# Altium PCB pdb-25.PcbDoc (part 3 of 4)
Units mil, origin at the board's own origin, x right, y up, seen from the top; angles counter-clockwise.
Board outline 5000 x 5500 mil, 4 copper layers (Top Layer, GND, 3V3, Bottom Layer), stack 23.756 mil thick; 410 components, 167 nets, 1014 pads, 884 vias.
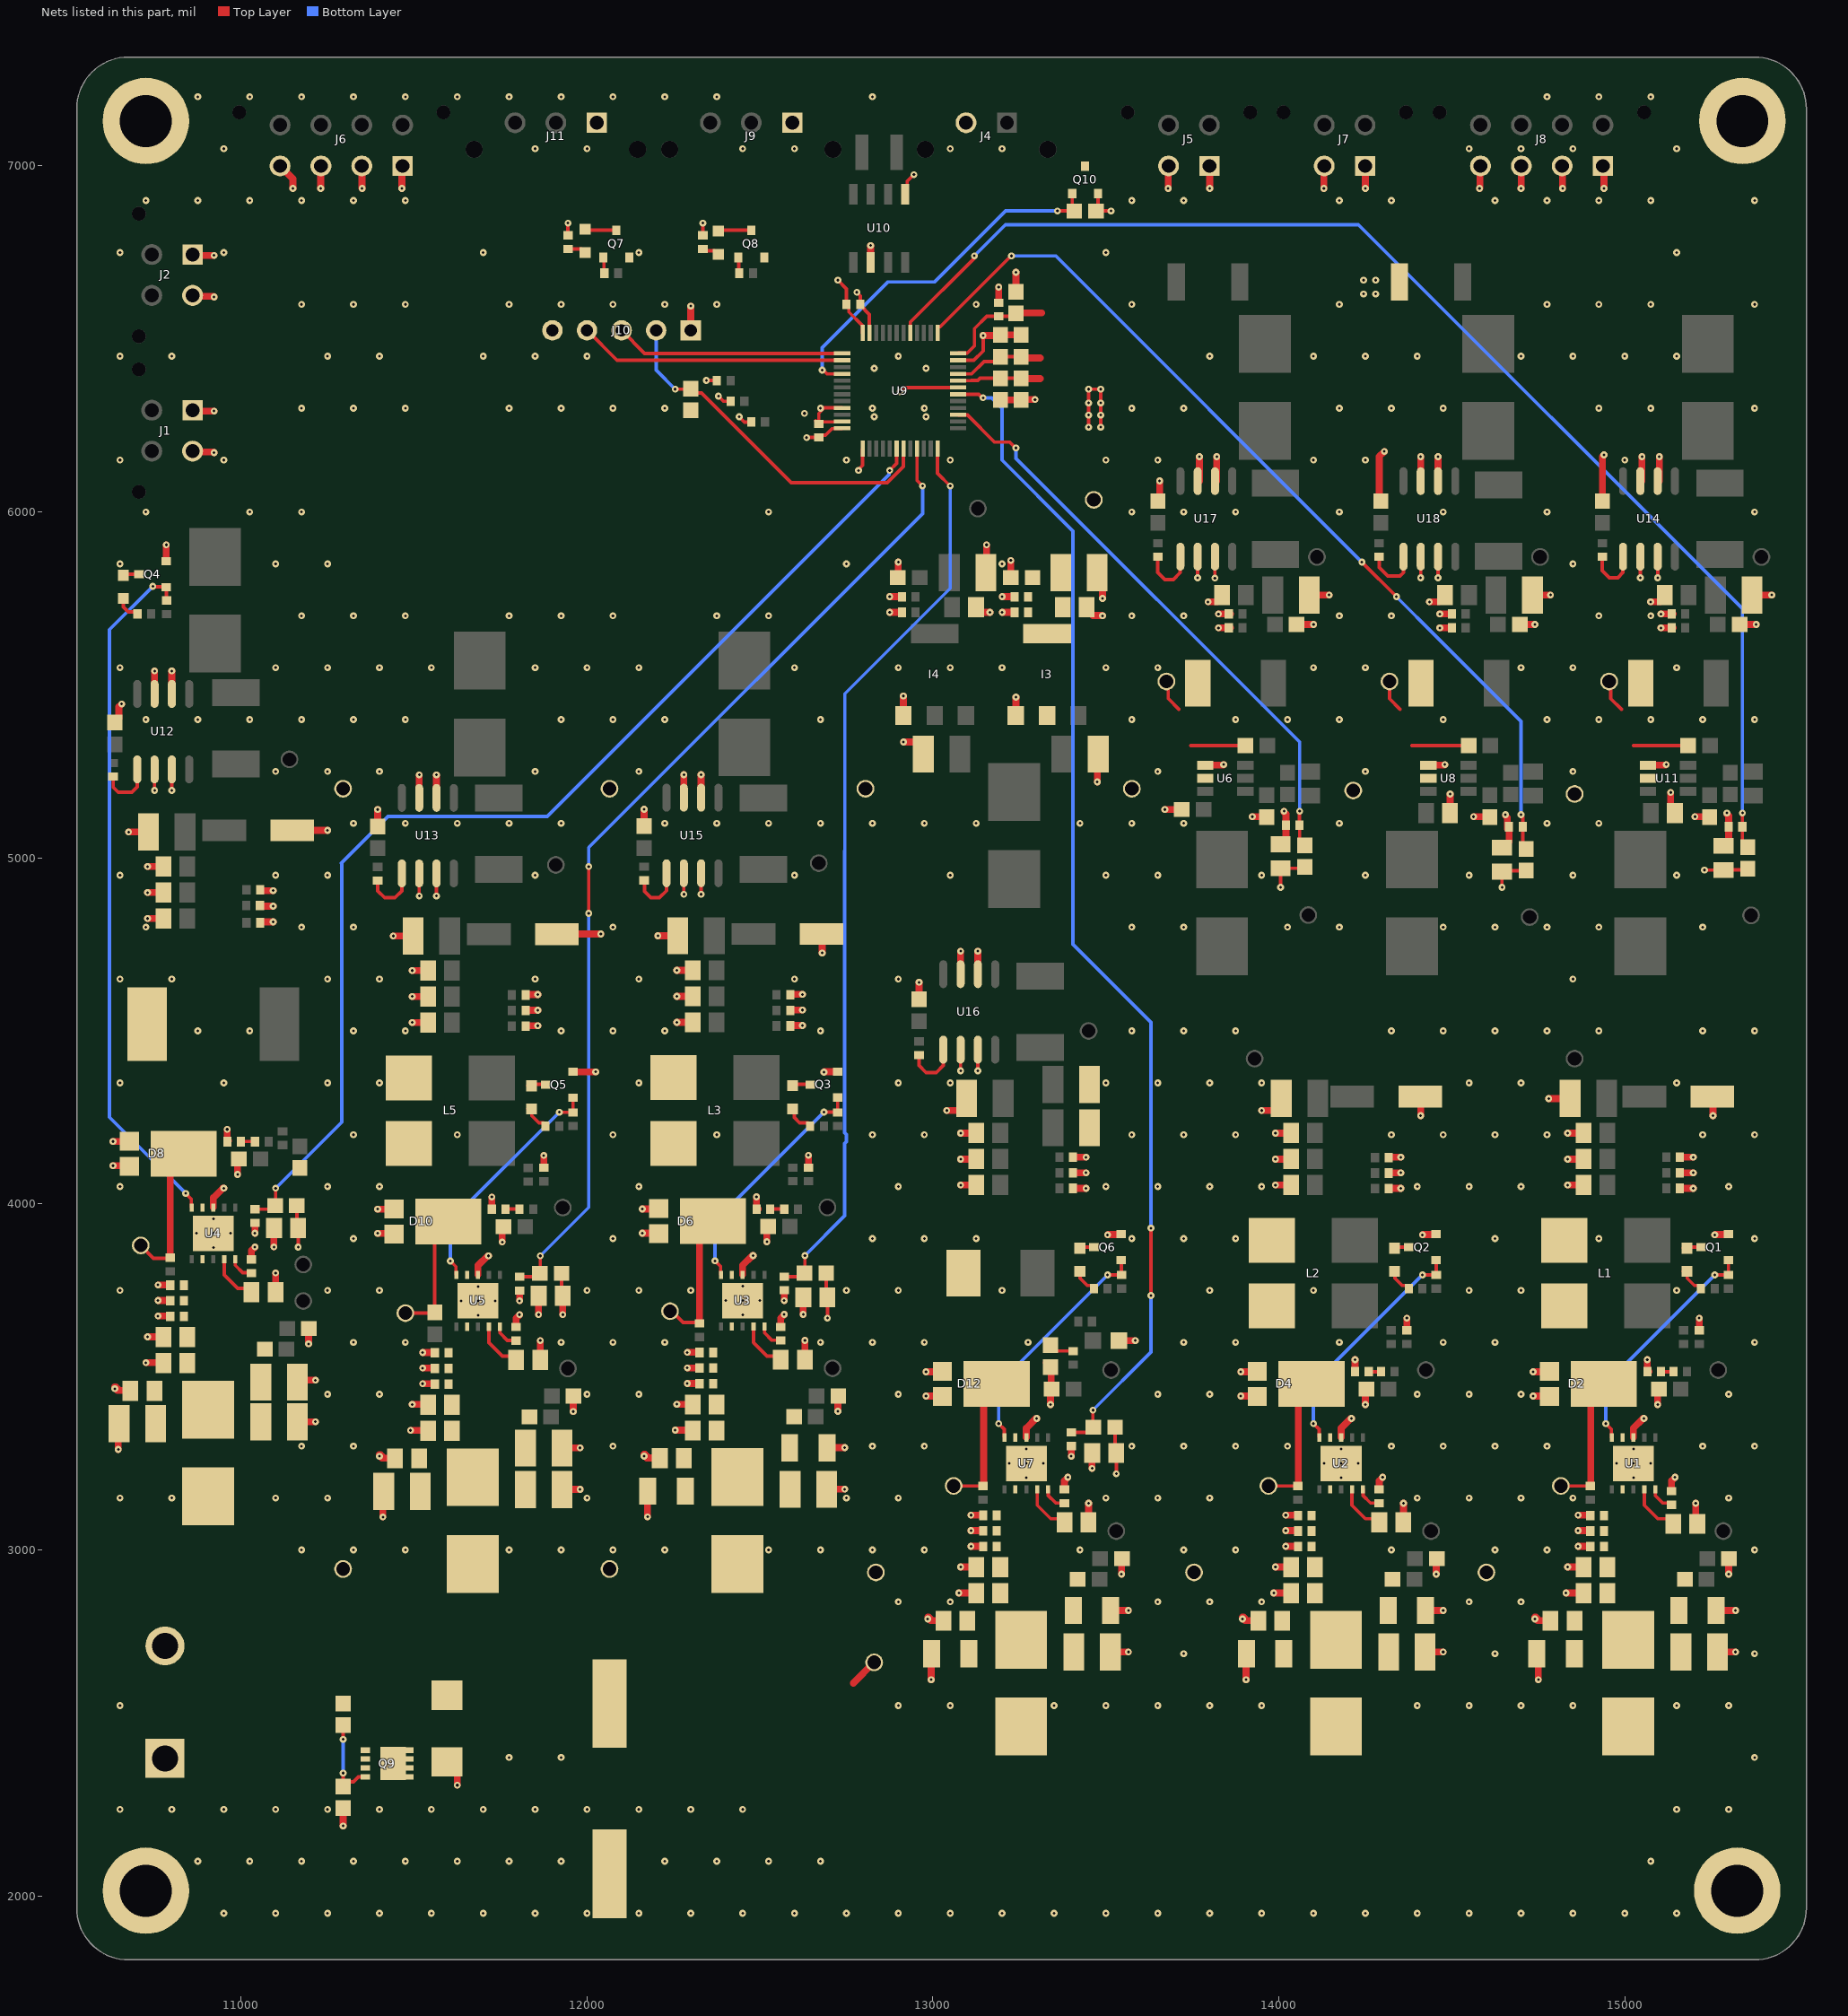
[diagram p5: the nets of this part, all layers, seen from the top]

## Via types
v1: diameter 20, hole 8, Top Layer to Bottom Layer, 854 vias
v2: diameter 17.72, hole 7.87, Top Layer to Bottom Layer, 30 vias

## Nets (pads, with @x,y where several pads share a name; then routed paths per layer and width w, separated by ;. In a path a pad name is that pad's centre, name@x,y a point inside that pad or via, vN(x,y) a via of type N, cw(c..) or ccw(c..) an arc to the next point about the centre after c; other vN are vias at no path point) (continued)
GND: C1.1 C2.1 C3.1 C4.1 C5.1 C6.1 C7.1 C8.1 C9.1 C10.1 C11.1 C12.1 C13.1 C14.1 C16.1 C17.1 C18.1 C19.1 C20.1 C21.1 C22.1 C23.1 C24.1 C25.1 C26.1 C27.1 C28.1 C29.1 C30.1 C31.1 C32.1 C33.1 C34.1 C35.1 C37.1 C38.1 C39.1 C40.1 C41.1 C42.1 C43.1 C44.1 C45.1 C46.1 C47.1 C48.1 C49.1 C50.1 C51.1 C52.1 C53.1 C54.1 C55.1 C56.1 C58.1 C59.1 C60.1 C61.1 C62.1 C63.1 C64.1 C65.1 C66.1 C67.1 C68.1 C69.1 C70.1 C71.1 C72.1 C73.1 C74.1 C75.1 C76.1 C77.1 C79.1 C80.1 C81.1 C82.1 C83.1 C84.1 C85.1 C86.1 C87.1 C88.1 C89.1 C90.1 C91.1 C92.1 C93.1 C94.1 C95.1 C96.1 C97.1 C98.1 C100.1 C101.1 C102.1 C103.1 C104.1 C105.1 C107.1 C108.1 C109.1 C110.1 C111.1 C113.2 C114.1 C115.1 C116.1 C117.1 C118.1 C120.1 C121.1 C122.1 C123.1 C124.1 C126.1 C127.1 C128.1 C129.1 C130.1 C131.1 C132.1 C133.1 C134.1 C135.1 C136.1 C137.1 C138.1 C139.1 C140.1 C141.1 C142.1 C143.1 C144.1 C145.1 C146.1 C147.2 C148.2 C149.2 C150.2 C151.2 C152.2 C153.2 C154.2 C155.2 C156.2 C157.2 C158.2 C159.2 C160.2 C161.1 C162.1 C163.1 C164.1 C165.1 C166.1 C167.1 C168.1 C170.1 C171.1 C172.1 C173.1 C174.1 C176.1 C177.1 C178.1 C179.1 C181.1 C182.1 C183.2 C184.1 C185.1 C186.2 C187.2 D2.1 D4.1 D6.1 D8.1 D10.1 D12.1 D15.2 GND.1 I3.1 I4.1 J1.1@10860,6294.06 J1.2 J2.1@10860,6744.06 J2.2 J5.1@13799.06,7000 J5.2 J6.1 J6.2 J6.3 J6.4 J7.1@14249.06,7000 J7.2 J8.1 J8.2 J8.3 J8.4 J9.P$1 J10.1 J11.P$1 pad. Q1.2 Q2.2 Q3.2 Q4.2 Q5.2 Q6.2 Q7.2 Q8.2 Q9.3 Q10.2 R4.1 R7.1 R8.1 R12.1 R15.1 R16.1 R20.1 R23.1 R24.1 R28.1 R31.1 R32.1 R36.1 R39.1 R40.1 R42.2 R46.1 R49.1 R62.1 R63.1 R64.1 R68.1 R69.1 R70.1 R72.1 R88.2 R90.1 R91.1 R93.1 R94.2 U1.8 U1.11 U2.8 U2.11 U3.8 U3.11 U4.8 U4.11 U5.8 U5.11 U6.1 U7.8 U7.11 U8.1 U9.19 U9.23 U9.35 U9.45 U9.47 U10.2 U11.1 U12.2 U12.3 U13.2 U13.3 U14.2 U14.3 U15.2 U15.3 U16.2 U16.3 U17.2 U17.3 U18.2 U18.3 | length 14119.7
  Top Layer w10: v1@12630,6285 v1@12631.91,6283.09 ; C140.1@12661.22,6263.46 12661.22,6261.5 12668.03,6254.69 C140.1@12670,6254.69 ; U9.47@12737.68,6261.42 12736.68,6260.42 12675.73,6260.42 C140.1@12670,6254.69 ; U9.45@12737.68,6300.79 12685.79,6300.79 12670,6285 C140.1@12670,6254.69 ; v1(12780,6635) 12780,6634.21 12789.68,6624.52 C141.1@12789.68,6600 12789.68,6598.03 12816.42,6571.3 U9.35@12816.42,6517.32 ; v1(12905,6347.08) 12907.71,6347.08 12920.47,6359.84 U9.19@13072.32,6359.84 ; U9.23@13072.32,6438.58 13118.58,6438.58 13145,6465 v1(13145,6510) ; C143.1@13195,6323.5 C143.1@13195,6324.49 ; Q10.2@13477.4,6920.63 13477.4,6875.91 R91.1@13471.5,6870 v1(13515,6870)
  Top Layer w20: v1(10630,4110.5) 10676.34,4110.5 D8.1@10677.56,4109.28 ; v1(10630,4180.5) 10676.34,4180.5 D8.1@10677.56,4181.72 ; v1@10635,3471 10637.71,3471 v1@10642.71,3466 ; C154.2@10635,5392 10646.65,5403.65 10646.65,5436.65 v1(10655,5445) ; v1@10642.71,3461 C65.1@10680.35,3461 ; v1(10645,3290.5) C80.1@10645,3366.87 ; v1(10675,5075) C67.1@10732.2,5075 ; v1(10725,3541) C66.1@10770.35,3541 ; v1(10730,3616) C70.1@10775.35,3616 ; v1(10730,4825) C74.1@10775.35,4825 ; v1(10730,4900) C69.1@10775.35,4900 ; v1(10730,4975) C68.1@10775.35,4975 ; U12.3@10750,5474.65 v1(10750,5540.5) ; v1(10760,3676) C71.1@10795.32,3676 ; v1(10760,3721) C72.1@10795.32,3721 ; v1(10760,3766) C73.1@10795.32,3766 ; Q4.2@10783.74,5857.4 v1(10783.74,5905) ; U12.2@10800,5474.65 v1(10800,5540.5) ; J1.2@10860,6175.94 10862.42,6173.52 10920.19,6173.52 v1(10922.11,6171.61) ; J1.1@10860,6294.06 10862.45,6291.61 v1(10922.11,6291.61) ; J2.2@10860,6625.94 10862.42,6623.52 10920.19,6623.52 v1(10922.11,6621.61) ; J2.1@10860,6744.06 10862.45,6741.61 v1(10922.11,6741.61) ; U4.8@10920,3990.8 10920,4017.61 10947.89,4045.5 v1(10950,4045.5) ; v1(10960,4215.5) 10960,4185.81 C84.1@10963.07,4182.75 ; v1(10990,4085.5) 10990,4127 C83.1@10993.5,4130.5 ; R31.1@11030,3840.68 11030,3865.02 11040,3875.02 v1(11040,3875.5) ; v1(11040,3915.5) R62.1@11040,3945.32 R62.1@11040,3945.82 ; C77.1@11057.34,4815.5 v1(11092.66,4815.5) ; C76.1@11057.34,4860.5 v1(11092.66,4860.5) ; C75.1@11057.34,4905.5 v1(11092.66,4905.5) ; v1(11095,3875.5) 11095,3930.15 C147.2@11095.35,3930.5 ; C82.1@11099.65,3746 11100,3746.35 v1(11100,3800.5) ; J6.4@11112.83,7000 11150,6962.83 v1(11150,6935) ; C64.1@11152.8,3396 11178.3,3370.5 v1(11215,3370.5) ; C81.1@11153.43,5080 v1(11250,5080) ; C79.1@11159.13,3506 11174.63,3490.5 v1(11215,3490.5) ; v1(11195,3595.5) 11195,3639 R28.1@11196.5,3640.5 ; v1(11230,6935) 11230.47,6935.47 11230.47,6999.53 J6.3@11230.94,7000 ; v1(11295,2202.21) R88.2@11295,2250.71 ; J6.2@11349.06,7000 11349.53,6999.53 11349.53,6935.47 v1(11350,6935) ; v1(11395,3915) 11441.34,3915 D10.1@11442.56,3913.78 ; v1(11395,3985) 11441.34,3985 D10.1@11442.56,3986.22 ; C155.2@11395,5091.5 v1(11395,5140) ; v1@11400,3275.5 11402.71,3275.5 v1@11407.71,3270.5 ; v1@11407.71,3265.5 C91.1@11445.35,3265.5 ; v1(11410,3095) C100.1@11410,3171.37 ; v1(11440,4774.5) C88.1@11497.2,4774.5 ; v1(11465,6935) 11465,6997.83 J6.1@11467.17,7000 ; v1(11490,3345.5) C86.1@11535.35,3345.5 ; v1(11495,3420.5) C87.1@11540.35,3420.5 ; v1(11495,4524.5) C95.1@11540.35,4524.5 ; v1(11495,4599.5) C89.1@11540.35,4599.5 ; v1(11495,4674.5) C90.1@11540.35,4674.5 ; U13.3@11515,5174.15 v1(11515,5240) ; v1(11525,3480.5) C92.1@11560.32,3480.5 ; v1(11525,3525.5) C93.1@11560.32,3525.5 ; v1(11525,3570.5) C94.1@11560.32,3570.5 ; U13.2@11565,5174.15 v1(11565,5240) ; D15.2@11595,2387.2 11625,2357.2 v1(11625,2320) ; U5.8@11685,3795.3 11685,3822.11 11712.89,3850 v1(11715,3850) ; C105.1@11725,3990.32 v1(11725,4020) ; v1(11755,3890) 11755,3931.5 C104.1@11758.5,3935 ; R39.1@11795,3645.18 11795,3669.52 11805,3679.52 v1(11805,3680) ; v1(11805,3720) R63.1@11805,3749.82 R63.1@11805,3750.32 ; C98.1@11822.34,4515 v1(11857.66,4515) ; C97.1@11822.34,4560 v1(11857.66,4560) ; C96.1@11822.34,4605 v1(11857.66,4605) ; v1(11860,3680) 11860,3734.65 C148.2@11860.35,3735 ; C103.1@11864.65,3550.5 11865,3550.85 v1(11865,3605) ; R40.1@11875,4105 v1(11875,4140) ; C85.1@11917.8,3200.5 11943.3,3175 v1(11980,3175) ; C102.1@11917.93,4780 v1(12040,4780) ; C101.1@11924.13,3310.5 11939.63,3295 v1(11980,3295) ; Q5.2@11959.37,4381.9 v1(12025,4381.9) ; v1(11960,3400) 11960,3443.5 R36.1@11961.5,3445 ; v1(12160,3915.5) 12206.34,3915.5 D6.1@12207.56,3914.28 ; v1(12160,3985.5) 12206.34,3985.5 D6.1@12207.56,3986.72 ; v1@12165,3276 12167.71,3276 v1@12172.71,3271 ; C157.2@12165,5092 v1(12165,5140.5) ; v1@12172.71,3266 C44.1@12210.35,3266 ; v1(12175,3095.5) C59.1@12175,3171.87 ; v1(12205,4775) C46.1@12262.2,4775 ; v1(12255,3346) C45.1@12300.35,3346 ; v1(12260,3421) C49.1@12305.35,3421 ; v1(12260,4525) C53.1@12305.35,4525 ; v1(12260,4600) C47.1@12305.35,4600 ; v1(12260,4675) C48.1@12305.35,4675 ; U15.3@12280,5174.65 v1(12280,5240.5) ; v1(12290,3481) C50.1@12325.32,3481 ; v1(12290,3526) C51.1@12325.32,3526 ; v1(12290,3571) C52.1@12325.32,3571 ; J10.1@12300,6525 v1(12300,6595) ; U15.2@12330,5174.65 v1(12330,5240.5) ; U3.8@12450,3795.8 12450,3822.61 12477.89,3850.5 v1(12480,3850.5) ; v1(12490,4020.5) 12490,3990.82 C63.1@12495.16,3985.66 ; v1(12520,3890.5) 12520,3932 C62.1@12523.5,3935.5 ; R23.1@12560,3645.68 12560,3670.02 12570,3680.02 v1(12570,3680.5) ; v1(12570,3720.5) R68.1@12570,3750.32 R68.1@12570,3750.82 ; C56.1@12587.34,4515.5 v1(12622.66,4515.5) ; C55.1@12587.34,4560.5 v1(12622.66,4560.5) ; C54.1@12587.34,4605.5 v1(12622.66,4605.5) ; v1(12625,3680.5) 12625,3735.15 C150.2@12625.35,3735.5 ; C61.1@12629.65,3551 12630,3551.35 v1(12630,3605.5) ; R24.1@12640,4105.5 v1(12640,4140.5) ; C60.1@12678.43,4785 12680,4783.43 v1(12680,4725.5) ; C43.1@12682.8,3201 12708.3,3175.5 v1(12745,3175.5) ; v1(12685,4381) 12686.2,4382.2 12723.17,4382.2 Q3.2@12724.37,4383.4 ; C58.1@12689.13,3311 12704.63,3295.5 v1(12745,3295.5) ; v1(12725,3400.5) 12725,3444 R20.1@12726.5,3445.5 ; U10.2@12820,6721.57 v1(12820,6770) ; v1(12875,5710) C129.1@12910.32,5710 ; v1(12875,5755) C128.1@12910.32,5755 ; C127.1@12898.5,5810 12900,5811.5 v1(12900,5855) ; I4.1@12914.45,5415.55 v1(12914.45,5468.11) ; v1(12915,5335) 12952.09,5335 12972.2,5314.88 C131.1@12972.2,5300 ; C158.2@12960,4592 v1(12960,4640.5) ; v1(12980,3445) 13026.34,3445 D12.1@13027.56,3443.78 ; v1(12980,3515) 13026.34,3515 D12.1@13027.56,3516.22 ; v1@12985,2805.5 12987.71,2805.5 v1@12992.71,2800.5 ; v1@12992.71,2795.5 C162.1@13030.35,2795.5 ; v1(12995,2625) C182.1@12995,2701.37 ; v1(13040,4270) 13072.09,4270 13097.2,4295.12 C117.1@13097.2,4304.5 ; v1(13075,2875.5) C116.1@13120.35,2875.5 ; v1(13080,2950.5) C115.1@13125.35,2950.5 ; v1(13080,4054.5) C166.1@13125.35,4054.5 ; v1(13080,4129.5) C161.1@13125.35,4129.5 ; v1(13080,4204.5) C118.1@13125.35,4204.5 ; U16.3@13080,4664.65 v1(13080,4730.5) ; v1(13110,3010.5) C163.1@13145.32,3010.5 ; v1(13110,3055.5) C164.1@13145.32,3055.5 ; v1(13110,3100.5) C165.1@13145.32,3100.5 ; C130.1@13124.65,5725 13139.65,5710 v1(13165,5710) ; U16.2@13130,4664.65 v1(13130,4730.5) ; v1(13145,6510) 13145.06,6510.06 13193.57,6510.06 C145.1@13195,6511.5 C146.1@13255,6511.5 ; C134.1@13152.8,5825 13155,5827.2 v1(13155,5905) ; C139.1@13190,6604.69 v1(13190,6650) ; C143.1@13195,6323.5 C144.1@13255,6323.5 13256.5,6325 v1(13295,6325) ; v1(13200.32,5710) C136.1@13235.63,5710 ; v1(13200.32,5755) C137.1@13235.63,5755 ; C135.1@13225,5810 v1(13225,5860) ; I3.1@13240,5412.44 v1(13240,5465) ; C142.1@13240,6647.34 v1(13240,6692.66) ; U7.8@13270,3325.3 13270,3352.11 13297.89,3380 v1(13300,3380) ; C187.2@13328.35,3541.14 13340,3529.49 C187.2@13340,3528.5 13341.75,3526.75 13341.75,3466.75 C185.1@13343.5,3465 13340,3461.5 v1(13340,3420) ; R93.1@13380,3175.18 13380,3199.52 13390,3209.52 v1(13390,3210) ; v1(13400,3270.5) R69.1@13400,3300.32 ; C179.1@13407.34,4045 v1(13442.66,4045) ; C177.1@13407.34,4090 v1(13442.66,4090) ; C167.1@13407.34,4135 v1(13442.66,4135) ; C138.1@13444.65,5725 13444.65,5718.9 13462.48,5701.06 13488.94,5701.06 v1(13490,5700) ; C184.1@13449.65,3080.5 13450,3080.85 v1(13450,3135) ; v1(13460,3235.5) C151.2@13460,3265.32 ; v1(13475,5220) 13475,5297.2 C133.1@13477.8,5300 ; C132.1@13475,5825 13490,5810 v1(13490,5750) ; C114.1@13502.8,2730.5 13528.3,2705 v1(13565,2705) ; v1(13505,3910.5) 13506.2,3911.7 13543.17,3911.7 Q6.2@13544.37,3912.9 ; C181.1@13509.13,2840.5 13524.63,2825 v1(13565,2825) ; R94.2@13537.4,3605 v1(13585,3605) ; v1(13545,2930) 13545,2973.5 R46.1@13546.5,2975 ; C159.2@13655.35,6031.5 v1(13655.35,6090) ; v1(13670.71,5140) 13713.86,5140 C111.1@13717.45,5136.41 ; v1(13680,6935) 13680.47,6935.47 13680.47,6999.53 J5.2@13680.94,7000 ; U17.3@13770.35,6089.15 v1(13770.35,6160) ; U6.1@13792.28,5267.4 13793.58,5268.7 13839.06,5268.7 v1(13840.35,5270) ; v1(13795.35,5740) 13822.87,5740 13840.71,5757.83 C110.1@13840.71,5760 ; J5.1@13799.06,7000 13800,6999.06 v1(13800,6935) ; U17.2@13820.35,6089.15 v1(13820.35,6160) ; v1(13825.35,5665) C109.1@13855.32,5665 C109.1@13860.67,5665 ; v1(13825.35,5705) C108.1@13855.32,5705 C108.1@13860.67,5705 ; v1(13890,3445) 13936.34,3445 D4.1@13937.56,3443.78 ; v1(13890,3515) 13936.34,3515 D4.1@13937.56,3516.22 ; v1@13895,2805.5 13897.71,2805.5 v1@13902.71,2800.5 ; v1@13902.71,2795.5 C23.1@13940.35,2795.5 ; v1(13905,2625) C38.1@13905,2701.37 ; v1(13923.26,5119.36) 13969.49,5119.36 R42.2@13970.35,5118.5 ; v1(13950,4270) 13982.09,4270 14007.2,4295.12 C25.1@14007.2,4304.5 ; v1(13985,2875.5) C24.1@14030.35,2875.5 ; v1(13990,2950.5) C28.1@14035.35,2950.5 ; v1(13990,4054.5) C32.1@14035.35,4054.5 ; v1(13990,4129.5) C27.1@14035.35,4129.5 ; v1(13990,4204.5) C26.1@14035.35,4204.5 ; C152.2@14005,5039.65 14020.32,5054.96 R70.1@14020.32,5095 14020.32,5126.98 14015,5132.29 v1(14015,5135) ; v1(14020,3010.5) C29.1@14055.32,3010.5 ; v1(14020,3055.5) C30.1@14055.32,3055.5 ; v1(14020,3100.5) C31.1@14055.32,3100.5 ; C107.1@14056.85,5675 v1(14100.35,5675) ; C113.2@14093.15,5760 v1(14145.35,5760) ; v1(14130,6935) 14130.47,6935.47 14130.47,6999.53 J7.2@14130.94,7000 ; U2.8@14180,3325.3 14180,3352.11 14207.89,3380 v1(14210,3380) ; C42.1@14220,3520.32 v1(14220,3550) ; J7.1@14249.06,7000 14250,6999.06 v1(14250,6935) ; v1(14250,3420) 14250,3461.5 C41.1@14253.5,3465 ; R15.1@14290,3175.18 14290,3199.52 14300,3209.52 v1(14300,3210) ; C160.2@14290,6031.5 14290,6160 v1(14305,6175) ; C35.1@14317.34,4045 v1(14352.66,4045) ; C34.1@14317.34,4090 v1(14352.66,4090) ; C33.1@14317.34,4135 v1(14352.66,4135) ; C40.1@14359.65,3080.5 14360,3080.85 v1(14360,3135) ; R16.1@14370,3635 v1(14370,3670) ; v1(14410,4255) C39.1@14410,4312.93 ; U18.3@14410,6089.15 v1(14410,6160) ; C22.1@14412.8,2730.5 14438.3,2705 v1(14475,2705) ; C39.1@14413.43,4314.5 C39.1@14415,4312.93 ; v1(14415,3910.5) 14416.2,3911.7 14453.17,3911.7 Q2.2@14454.37,3912.9 ; C37.1@14419.13,2840.5 14434.63,2825 v1(14475,2825) ; U8.1@14431.93,5267.4 14433.23,5268.7 14478.7,5268.7 v1(14480,5270) ; v1(14435,5740) 14462.52,5740 14480.35,5757.83 C123.1@14480.35,5760 ; v1(14455,2930) 14455,2973.5 R12.1@14456.5,2975 ; U18.2@14460,6089.15 v1(14460,6160) ; v1(14465,5665) C122.1@14500.32,5665 ; v1(14465,5705) C121.1@14500.32,5705 ; C124.1@14494.65,5130 14495,5130.35 v1(14495,5185) ; v1(14562.91,5119.36) 14609.14,5119.36 R49.1@14610,5118.5 ; v1(14580,6935) 14581.42,6936.41 14581.42,6998.59 J8.4@14582.83,7000 ; C153.2@14645,5029.65 14647.48,5029.65 14665.32,5047.48 R72.1@14665.32,5090 ; v1@14655,5122.29 14660.32,5116.98 R72.1@14660.32,5085 ; C120.1@14696.5,5675 v1(14740,5675) ; v1(14700,6935) 14700.47,6935.47 14700.47,6999.53 J8.3@14700.94,7000 ; C126.1@14732.8,5760 v1(14785,5760) ; v1(14735,3445) 14781.34,3445 D2.1@14782.56,3443.78 ; v1(14735,3515) 14781.34,3515 D2.1@14782.56,3516.22 ; v1@14740,2805.5 14742.71,2805.5 v1@14747.71,2800.5 ; v1@14747.71,2795.5 C2.1@14785.35,2795.5 ; v1(14750,2625) C17.1@14750,2701.37 ; v1(14780,4304.5) C4.1@14837.2,4304.5 ; J8.2@14819.06,7000 14819.53,6999.53 14819.53,6935.47 v1(14820,6935) ; v1(14830,2875.5) C3.1@14875.35,2875.5 ; v1(14835,2950.5) C7.1@14880.35,2950.5 ; v1(14835,4054.5) C11.1@14880.35,4054.5 ; v1(14835,4129.5) C6.1@14880.35,4129.5 ; v1(14835,4204.5) C5.1@14880.35,4204.5 ; v1(14865,3010.5) C8.1@14900.32,3010.5 ; v1(14865,3055.5) C9.1@14900.32,3055.5 ; v1(14865,3100.5) C10.1@14900.32,3100.5 ; C156.2@14935,6031.5 14935,6160 v1(14940,6165) ; J8.1@14937.17,7000 14940,6997.17 v1(14940,6935) ; U1.8@15025,3325.3 15025,3352.11 15052.89,3380 v1(15055,3380) ; U14.3@15049.65,6089.15 v1(15049.65,6160) ; v1(15065,3550) 15065,3520.32 C21.1@15070.16,3515.16 ; U11.1@15071.57,5267.4 15072.87,5268.7 15118.35,5268.7 v1(15119.65,5270) ; v1(15074.65,5740) 15102.17,5740 15120,5757.83 C173.1@15120,5760 ; v1(15095,3420) 15095,3461.5 C20.1@15098.5,3465 ; U14.2@15099.65,6089.15 v1(15099.65,6160) ; v1(15104.65,5665) C172.1@15135.32,5665 C172.1@15139.96,5665 ; v1(15104.65,5705) C171.1@15135.32,5705 C171.1@15139.96,5705 ; v1(15132.55,5189.36) 15132.55,5143.59 C174.1@15136.14,5140 ; R7.1@15135,3175.18 15135,3199.52 15145,3209.52 v1(15145,3210) ; C14.1@15162.34,4045 v1(15197.66,4045) ; C13.1@15162.34,4090 v1(15197.66,4090) ; C12.1@15162.34,4135 v1(15197.66,4135) ; v1(15202.55,5119.36) 15248.79,5119.36 R90.1@15249.65,5118.5 ; C19.1@15204.65,3080.5 15205,3080.85 v1(15205,3135) ; R8.1@15215,3635 v1(15215,3670) ; C18.1@15253.43,4314.5 15255,4312.93 v1(15255,4255) ; C1.1@15257.8,2730.5 15283.3,2705 v1(15320,2705) ; v1(15260,3910.5) 15261.2,3911.7 15298.17,3911.7 Q1.2@15299.37,3912.9 ; C16.1@15264.13,2840.5 15279.63,2825 v1(15320,2825) ; C149.2@15285,5034.65 15300.32,5049.96 R64.1@15300.32,5090 15300.32,5121.98 v1@15295,5127.29 ; v1(15300,2930) 15300,2973.5 R4.1@15301.5,2975 ; C170.1@15336.14,5675 v1(15379.65,5675) ; C176.1@15372.44,5760 v1(15424.65,5760)
  other v1: 10950,1950 11100,1950 11250,1950 11400,1950 11550,1950 11700,1950 11850,1950 12000,1950 12150,1950 12300,1950 12450,1950 12600,1950 12750,1950 12900,1950 13050,1950 13200,1950 13350,1950 13500,1950 13650,1950 13800,1950 13950,1950 14100,1950 14250,1950 14400,1950 14550,1950 14700,1950 14850,1950 15000,1950 15150,1950 10875,2100 11025,2100 11175,2100 11325,2100 11475,2100 11625,2100 11775,2100 11925,2100 12225,2100 12375,2100 12525,2100 12675,2100 15075,2100 10650,2250 10800,2250 10950,2250 11100,2250 11250,2250 11400,2250 11550,2250 11700,2250 11850,2250 12000,2250 12150,2250 12300,2250 12450,2250 15150,2250 15300,2250 11775,2400 11925,2400 15375,2400 10650,2550 12900,2550 13050,2550 13350,2550 13500,2550 13650,2550 13800,2550 13950,2550 14400,2550 14550,2550 14700,2550 14850,2550 15150,2550 15300,2550 13725,2700 14625,2700 15375,2700 12985,2800.5 13895,2800.5 14740,2800.5 12900,2850 13050,2850 13650,2850 13800,2850 13950,2850 14550,2850 14700,2850 11175,3000 11325,3000 11475,3000 11775,3000 11925,3000 12075,3000 12225,3000 12525,3000 12675,3000 12825,3000 12975,3000 13425,3000 13725,3000 13875,3000 14325,3000 14625,3000 14775,3000 15375,3000 10650,3150 10800,3150 11100,3150 11250,3150 12000,3150 12750,3150 12900,3150 13500,3150 13650,3150 13800,3150 14400,3150 14550,3150 14700,3150 14850,3150 15300,3150 11400,3270.5 12165,3271 11175,3300 11325,3300 12075,3300 12825,3300 12975,3300 13575,3300 13725,3300 13875,3300 14025,3300 14325,3300 14475,3300 14625,3300 14775,3300 15225,3300 15375,3300 11250,3450 11400,3450 12000,3450 12150,3450 12900,3450 13650,3450 13800,3450 14400,3450 14550,3450 14700,3450 15300,3450 10635,3466 11325,3600 11475,3600 11925,3600 12075,3600 12225,3600 12675,3600 12825,3600 12975,3600 13275,3600 13725,3600 13875,3600 14175,3600 14475,3600 14625,3600 15375,3600 10650,3750 11250,3750 11400,3750 12000,3750 12150,3750 12300,3750 12750,3750 12900,3750 13200,3750 13800,3750 14100,3750 14550,3750 14700,3750 15150,3750 11325,3900 12075,3900 12825,3900 12975,3900 13125,3900 13575,3900 13725,3900 13875,3900 14625,3900 14925,3900 15375,3900 10650,4050 11250,4050 11400,4050 12150,4050 12900,4050 13500,4050 13650,4050 13800,4050 13950,4050 14400,4050 14550,4050 14700,4050 15300,4050 11325,4200 11625,4200 12075,4200 12375,4200 12825,4200 12975,4200 13575,4200 13725,4200 13875,4200 14325,4200 14475,4200 14625,4200 14775,4200 15225,4200 15375,4200 10650,4350 10950,4350 11250,4350 11400,4350 12150,4350 12900,4350 13050,4350 13500,4350 13650,4350 13800,4350 13950,4350 14550,4350 14700,4350 15150,4350 10875,4500 11025,4500 11325,4500 11475,4500 11925,4500 12075,4500 12225,4500 12675,4500 13575,4500 13725,4500 13875,4500 14325,4500 14475,4500 14625,4500 14775,4500 14925,4500 15225,4500 15375,4500 10650,4650 10800,4650 11250,4650 11400,4650 11850,4650 12150,4650 12600,4650 12900,4650 14850,4650 10725,4800 11175,4800 11325,4800 12075,4800 13575,4800 13725,4800 14025,4800 14175,4800 14475,4800 14625,4800 14775,4800 14925,4800 15225,4800 10650,4950 11100,4950 11250,4950 11850,4950 12600,4950 13050,4950 13500,4950 13650,4950 13950,4950 14250,4950 14550,4950 14850,4950 15150,4950 11325,5100 11475,5100 11625,5100 11775,5100 11925,5100 12225,5100 12375,5100 12525,5100 12675,5100 12825,5100 12975,5100 13125,5100 13425,5100 13575,5100 13725,5100 14175,5100 14775,5100 14925,5100 14655,5125 15295,5130 11100,5250 11250,5250 11400,5250 11850,5250 12150,5250 13650,5250 14250,5250 14850,5250 10725,5400 10875,5400 11025,5400 11175,5400 11325,5400 11475,5400 11925,5400 12075,5400 12225,5400 12675,5400 13575,5400 13875,5400 14025,5400 14175,5400 14475,5400 14775,5400 14925,5400 15075,5400 15225,5400 15375,5400 10650,5550 11100,5550 11250,5550 11400,5550 11550,5550 11850,5550 12000,5550 12150,5550 12600,5550 12900,5550 13050,5550 13200,5550 13500,5550 13650,5550 14100,5550 14250,5550 14700,5550 14850,5550 15150,5550 11175,5700 11325,5700 11475,5700 11775,5700 11925,5700 12075,5700 12375,5700 12525,5700 13575,5700 13725,5700 14175,5700 14325,5700 14925,5700 15075,5700 10650,5850 11100,5850 11250,5850 12750,5850 13200,5850 14850,5850 10725,6000 11025,6000 11175,6000 12525,6000 13575,6000 13725,6000 13875,6000 14175,6000 14475,6000 14775,6000 15375,6000 10650,6150 10950,6150 12750,6150 13050,6150 13500,6150 13650,6150 14100,6150 14250,6150 15000,6150 12830,6275 12980,6275 12628.65,6285 11175,6300 11325,6300 11475,6300 11775,6300 11925,6300 12075,6300 12225,6300 12675,6300 12825,6300 12975,6300 13575,6300 13725,6300 14175,6300 14325,6300 14475,6300 14925,6300 15075,6300 15375,6300 12830,6415 12980,6415 10650,6450 10800,6450 11250,6450 11400,6450 11700,6450 11850,6450 12000,6450 12900,6450 13800,6450 14100,6450 14250,6450 14400,6450 14700,6450 14850,6450 15000,6450 15150,6450 11175,6600 11325,6600 11475,6600 11775,6600 11925,6600 12075,6600 12225,6600 12375,6600 13125,6600 13575,6600 14175,6600 14775,6600 14925,6600 15075,6600 15375,6600 10650,6750 10950,6750 11700,6750 12150,6750 13500,6750 15150,6750 10725,6900 10875,6900 11025,6900 11175,6900 11325,6900 11475,6900 13575,6900 13725,6900 14175,6900 14325,6900 14625,6900 14775,6900 14925,6900 15075,6900 15375,6900 10950,7050 11850,7050 12000,7050 12450,7050 12600,7050 13050,7050 13200,7050 14550,7050 14700,7050 14850,7050 15150,7050 10875,7200 11025,7200 11175,7200 11325,7200 11475,7200 11625,7200 11775,7200 11925,7200 12075,7200 12225,7200 12375,7200 12825,7200 14775,7200 14925,7200 15075,7200
  other v2: 13270,3208.66 14180,3208.66 15025,3208.66 13220.79,3250 13270,3250 13319.21,3250 14130.79,3250 14180,3250 14229.21,3250 14975.79,3250 15025,3250 15074.21,3250 13270,3291.34 14180,3291.34 15025,3291.34 11685,3678.66 12450,3679.16 11635.79,3720 11685,3720 11734.21,3720 12400.79,3720.5 12450,3720.5 12499.21,3720.5 11685,3761.34 12450,3761.84 10920,3873.66 10870.79,3915 10920,3915 10969.21,3915 10920,3956.34
NetC21_2: C21.2 R6.1 | length 40.6
  Top Layer w10: C21.2@15104.37,3515 R6.1@15145,3515
NetC42_2: C42.2 R14.1 | length 40.6
  Top Layer w10: C42.2@14259.37,3515 R14.1@14300,3515
NetC63_2: C63.2 R22.1 | length 40.6
  Top Layer w10: C63.2@12529.37,3985.5 R22.1@12570,3985.5
NetC84_2: C84.2 R30.1 | length 40.6
  Top Layer w10: C84.2@10999.37,4180.5 R30.1@11040,4180.5
NetC99_2: 
NetC105_2: C105.2 R38.1 | length 40.6
  Top Layer w10: C105.2@11764.37,3985 R38.1@11805,3985
NetC156_1: 
NetC157_1: 
NetC158_1: 
NetC187_1: C187.1 R92.1 | length 72
  Top Layer w10: C187.1@13340,3591.5 13356.5,3575 13404.68,3575 R92.1@13405,3574.68
NetD1_1: D1.1 R1.1 | length 78
  Top Layer w10: D1.1@15169.58,3805.3 15180.32,3794.56 15180.32,3785.18 15201.22,3764.28 15213.5,3764.28 15220.32,3757.47 R1.1@15220.32,3755.5
NetD1_2: D1.2 Q1.3 | length 52.4
  Top Layer w10: D1.2@15169.58,3872.3 15172.77,3875.5 Q1.3@15220.63,3875.5
NetD3_1: D3.1 R9.1 | length 78
  Top Layer w10: D3.1@14324.58,3805.3 14335.32,3794.56 14335.32,3785.18 14356.22,3764.28 14368.5,3764.28 14375.32,3757.47 R9.1@14375.32,3755.5
NetD3_2: D3.2 Q2.3 | length 52.4
  Top Layer w10: D3.2@14324.58,3872.3 14327.77,3875.5 Q2.3@14375.63,3875.5
NetD5_1: D5.1 R17.1 | length 84
  Top Layer w10: D5.1@12594.58,4274.81 12599.24,4270.14 12599.24,4249.91 12614.37,4234.78 12638.5,4234.78 12645.32,4227.97 R17.1@12645.32,4226
NetD5_2: D5.2 Q3.3 | length 52.4
  Top Layer w10: D5.2@12584.58,4342.81 D5.2@12587.77,4346 ; D5.2@12597.77,4346 Q3.3@12645.63,4346
NetD7_1: D7.1 R25.1 | length 73.9
  Top Layer w10: D7.1@10659.58,5749.81 10660,5749.38 10660,5725 10673.82,5711.18 10694.45,5711.18 R25.1@10700.63,5705
NetD7_2: D7.2 Q4.3 | length 46.7
  Top Layer w10: D7.2@10659.58,5816.81 10662.77,5820 Q4.3@10705,5820
NetD9_1: D9.1 R33.1 | length 78
  Top Layer w10: D9.1@11829.58,4275.31 11840.32,4264.56 11840.32,4255.18 11861.22,4234.28 11873.5,4234.28 11880.32,4227.47 R33.1@11880.32,4225.5
NetD9_2: D9.2 Q5.3 | length 52.4
  Top Layer w10: D9.2@11829.58,4342.31 11832.77,4345.5 Q5.3@11880.63,4345.5
NetD11_1: D11.1 R43.1 | length 78
  Top Layer w10: D11.1@13414.58,3805.3 13425.32,3794.56 13425.32,3785.18 13446.22,3764.28 13458.5,3764.28 13465.32,3757.47 R43.1@13465.32,3755.5
NetD11_2: D11.2 Q6.3 | length 52.4
  Top Layer w10: D11.2@13414.58,3872.3 13417.77,3875.5 Q6.3@13465.63,3875.5
NetD13_1: D13.1 R57.1 | length 53.9
  Top Layer w10: R57.1@11945,6760.31 11984.07,6760.31 D13.1@11994.58,6749.81
NetD13_2: D13.2 Q7.3 | length 91.4
  Top Layer w10: D13.2@11994.58,6816.81 11997.01,6814.37 Q7.3@12085,6814.37
NetD14_1: D14.1 R58.1 | length 51
  Top Layer w10: R58.1@12335,6760.31 12340.32,6755 12369.38,6755 D14.1@12379.58,6744.81
NetD14_2: D14.2 Q8.3 | length 96.5
  Top Layer w10: D14.2@12379.58,6811.81 12382.14,6814.37 Q8.3@12475,6814.37
NetJ3_1: J3.1 Q9.2
NetQ7_1: Q7.1 R53.1 | length 46.8
  Top Layer w10: Q7.1@12047.6,6735.63 12048.96,6734.27 12048.96,6691.36 R53.1@12050.32,6690
NetQ8_1: Q8.1 R54.1 | length 46.8
  Top Layer w10: Q8.1@12437.6,6735.63 12438.96,6734.27 12438.96,6691.36 R54.1@12440.32,6690
NetQ9_1: Q9.1 R87.2 R88.1 | length 248
  Top Layer w10: v1(11295,2355) R88.1@11295,2316.5 11308.5,2330 11325,2330 11339.29,2344.29 Q9.1@11359.53,2344.29 ; v1@11295,2455 R87.2@11295,2488.5
  Bottom Layer w10: v1(11295,2355) v1@11295,2455
  other v1: 11295,2452.5
NetR59_2: 
NetR60_2: 
NetR61_2: 
NetR65_2: 
NetR66_2: 
NetR67_2: 
NetR71_2: 
NetR76_1: R76.1 U12.5 | length 163.8
  Top Layer w10: R76.1@10630,5235.31 10630.64,5234.68 10630.64,5204.36 10645,5190 10684.5,5190 10700,5205.5 U12.5@10700,5255.85 U12.5@10700,5256.35
NetR77_1: R77.1 U13.5 | length 167.2
  Top Layer w10: R77.1@11395,4934.81 11395,4905 11415,4885 11445,4885 11465,4905 U13.5@11465,4955.35 U13.5@11465,4955.85
NetR78_1: R78.1 U14.5 | length 162.4
  Top Layer w10: R78.1@14935,5870.31 14935,5830 14955,5810 14979.65,5810 14994.62,5824.97 14994.62,5865.82 U14.5@14999.65,5870.85
NetR82_1: R82.1 U15.5 | length 162.9
  Top Layer w10: R82.1@12165,4935.31 12166.14,4934.18 12166.14,4903.86 12185,4885 12209.5,4885 12230,4905.5 U15.5@12230,4956.35
NetR83_1: R83.1 U16.5 | length 162.7
  Top Layer w10: R83.1@12960,4430.31 12960,4400 12980,4380 13010,4380 13030,4400 U16.5@13030,4445.85
NetR84_1: R84.1 U17.5 | length 177.3
  Top Layer w10: R84.1@13650,5872.44 13650,5825 13670,5805 13695.35,5805 13715,5824.65 13715,5865.5 U17.5@13720.35,5870.85
NetR86_1: R86.1 U18.5 | length 161.7
  Top Layer w10: R86.1@14290,5871.34 14290,5840 14315,5815 14350,5815 14359.79,5824.79 14359.79,5870.64 U18.5@14360,5870.85
NRST: C178.2 J10.2 U9.7 | length 1038.3
  Top Layer w10: v1(12255,6355) 12297.52,6355 C178.2@12301.26,6358.74 ; C178.2@12300,6356.5 12312.29,6344.2 12330.8,6344.2 12590,6085 12868.28,6085 12914.84,6131.56 U9.7@12914.84,6182.68
  Bottom Layer w10: J10.2@12200,6525 12200,6410 v1(12255,6355)
PGOOD_0: Q1.1 R3.1 U1.10 | length 690.5
  Top Layer w10: v1(14945,3365) 14961.1,3348.9 14961.1,3326.21 U1.10@14962.01,3325.3 ; v1(15260,3795) 15260.16,3794.84 15299.84,3794.84 R3.1@15300,3794.68 ; Q1.1@15299.37,3838.1 15299.69,3837.78 15299.69,3795.5 R3.1@15300,3795.18
  Bottom Layer w10: v1(14945,3365) 14945,3480 v1(15260,3795)
PGOOD_1: Q2.1 R11.1 U2.10 | length 690.5
  Top Layer w10: v1(14100,3365) 14116.1,3348.9 14116.1,3326.21 U2.10@14117.01,3325.3 ; v1(14415,3795) 14415.16,3794.84 14454.84,3794.84 R11.1@14455,3794.68 ; Q2.1@14454.37,3838.1 14454.69,3837.78 14454.69,3795.5 R11.1@14455,3795.18
  Bottom Layer w10: v1(14100,3365) 14100,3480 v1(14415,3795)
PGOOD_2: Q3.1 R19.1 U3.10 | length 690.5
  Top Layer w10: v1(12370,3835.5) 12386.1,3819.4 12386.1,3796.71 U3.10@12387.01,3795.8 ; v1(12685,4265.5) 12685.16,4265.34 12724.84,4265.34 R19.1@12725,4265.19 ; Q3.1@12724.37,4308.6 12724.69,4308.28 12724.69,4266 R19.1@12725,4265.69
  Bottom Layer w10: v1(12370,3835.5) 12370,3950.5 v1(12685,4265.5)
PGOOD_3: Q4.1 R27.1 U4.10 | length 2022.6
  Top Layer w10: v1(10745,5785) 10746.2,5783.8 10782.54,5783.8 Q4.1@10783.74,5782.6 10784.37,5781.97 10784.37,5745 R27.1@10785,5744.37 ; v1(10840,4030.5) 10856.1,4014.4 10856.1,3991.71 U4.10@10857.01,3990.8
  Bottom Layer w10: v1(10745,5785) 10620,5660 10620,4250.5 v1(10840,4030.5)
PGOOD_4: Q5.1 R35.1 U5.10 | length 690.5
  Top Layer w10: v1(11605,3835) 11621.1,3818.9 11621.1,3796.21 U5.10@11622.01,3795.3 ; v1(11920,4265) 11920.16,4264.84 11959.84,4264.84 R35.1@11960,4264.69 ; Q5.1@11959.37,4308.1 11959.69,4307.78 11959.69,4265.5 R35.1@11960,4265.19
  Bottom Layer w10: v1(11605,3835) 11605,3950 v1(11920,4265)
PGOOD_6: Q6.1 R45.1 U7.10 | length 690.5
  Top Layer w10: v1(13190,3365) 13206.1,3348.9 13206.1,3326.21 U7.10@13207.01,3325.3 ; v1(13505,3795) 13505.16,3794.84 13544.84,3794.84 R45.1@13545,3794.68 ; Q6.1@13544.37,3838.1 13544.69,3837.78 13544.69,3795.5 R45.1@13545,3795.18
  Bottom Layer w10: v1(13190,3365) 13190,3480 v1(13505,3795)
RA_LASER_GND: J4.2 Q10.3 | length 0.9
  Top Layer w10: Q10.3@13439.37,7000 Q10.3@13440,6999.37
RA_LASER_MCU: Q10.1 R91.2 U9.40 | length 1067.3
  Top Layer w10: v1(12680,6410) 12682.71,6410 12693.49,6399.21 U9.40@12737.68,6399.21 ; v1(13360,6870) R91.2@13403.5,6870 ; Q10.1@13402.6,6915.63 13402.6,6870.91 R91.2@13403.5,6870 ; R91.2@13408.5,6865 R91.2@13403.5,6870
  Bottom Layer w10: v1(12680,6410) 12680,6475 12870,6665 13005.35,6665 13210.35,6870 v1(13360,6870)
RT-CLK: R7.2 U1.5 | length 74.4
  Top Layer w10: U1.5@15087.99,3175.7 15088.36,3175.33 15088.36,3157.14 15110,3135.5 15134.68,3135.5 R7.2@15135,3135.82
RT-CLK_1: R15.2 U2.5 | length 74.4
  Top Layer w10: U2.5@14242.99,3175.7 14243.36,3175.33 14243.36,3157.14 14265,3135.5 14289.68,3135.5 R15.2@14290,3135.82
RT-CLK_2: R23.2 U3.5 | length 74.4
  Top Layer w10: U3.5@12512.99,3646.2 12513.36,3645.83 12513.36,3627.64 12535,3606 12559.68,3606 R23.2@12560,3606.32
RT-CLK_3: R31.2 U4.5 | length 74.4
  Top Layer w10: U4.5@10982.99,3841.2 10983.36,3840.83 10983.36,3822.64 11005,3801 11029.68,3801 R31.2@11030,3801.32
RT-CLK_4: R39.2 U5.5 | length 74.4
  Top Layer w10: U5.5@11747.99,3645.7 11748.36,3645.33 11748.36,3627.14 11770,3605.5 11794.68,3605.5 R39.2@11795,3605.82
RT-CLK_6: R93.2 U7.5 | length 74.4
  Top Layer w10: U7.5@13332.99,3175.7 13333.36,3175.33 13333.36,3157.14 13355,3135.5 13379.68,3135.5 R93.2@13380,3135.82
SS-TR: C19.2 U1.4 | length 145.6
  Top Layer w10: U1.4@15056.5,3175.7 15056.5,3129 15095.5,3090 15125.85,3090 C19.2@15135.35,3080.5
SS-TR_1: C40.2 U2.4 | length 145.6
  Top Layer w10: U2.4@14211.5,3175.7 14211.5,3129 14250.5,3090 14280.85,3090 C40.2@14290.35,3080.5
SS-TR_2: C61.2 U3.4 | length 145.6
  Top Layer w10: U3.4@12481.5,3646.2 12481.5,3599.5 12520.5,3560.5 12550.85,3560.5 C61.2@12560.35,3551
SS-TR_3: C82.2 U4.4 | length 145.6
  Top Layer w10: U4.4@10951.5,3841.2 10951.5,3794.5 10990.5,3755.5 11020.85,3755.5 C82.2@11030.35,3746
SS-TR_4: C103.2 U5.4 | length 145.6
  Top Layer w10: U5.4@11716.5,3645.7 11716.5,3599 11755.5,3560 11785.85,3560 C103.2@11795.35,3550.5
SS-TR_6: C184.2 U7.4 | length 145.6
  Top Layer w10: U7.4@13301.5,3175.7 13301.5,3129 13340.5,3090 13370.85,3090 C184.2@13380.35,3080.5
SW_0: C15.2 D2.2 L1.1 SW.1@14815,3185 U1.9 | length 425.3
  Top Layer w10: L1.1@14786.34,3655.5 L1.1@14787.56,3656.72 ; SW.1@14815,3185 14815,3203.86 14827.95,3190.91 14827.95,3190.54 14833.8,3184.68 C15.2@14900,3184.68 C15.2@14901.5,3186.18
  Top Layer w20: C15.2@14901.5,3186.18 14901.5,3442.17 D2.2@14939.33,3480
SW_1: C36.2 D4.2 L2.1 SW.1@13970,3185 U2.9 | length 425.3
  Top Layer w10: L2.1@13941.34,3655.5 L2.1@13942.56,3656.72 ; SW.1@13970,3185 13970,3203.86 13982.95,3190.91 13982.95,3190.54 13988.8,3184.68 C36.2@14055,3184.68 C36.2@14056.5,3186.18
  Top Layer w20: C36.2@14056.5,3186.18 14056.5,3442.17 D4.2@14094.33,3480
SW_2: C57.2 D6.2 L3.1 SW.1@12240,3690 U3.9 | length 417.1
  Top Layer w10: L3.1@12211.34,4126 L3.1@12212.56,4127.22 ; SW.1@12240,3695 12277.66,3657.34 12322.34,3657.34 C57.2@12325,3654.68 ; 12325,3685 12326.5,3686.5
  Top Layer w20: C57.2@12325,3654.68 12325,3685 12325,3910.67 D6.2@12364.33,3950
SW_3: C78.2 D8.2 L4.1 SW.1@10710,3880 U4.9 | length 425.4
  Top Layer w10: SW.1@10710,3880 10746.81,3843.19 C78.2@10803.5,3843.19
  Top Layer w20: C78.2@10795,3844.68 10795,4105.67 D8.2@10834.33,4145
SW_4: C99.2 D10.2 L5.1 SW.1@11475,3684.5 U5.9 | length 407.4
  Top Layer w10: L5.1@11446.34,4125.5 L5.1@11447.56,4126.72 ; SW.1@11475,3684.5 11558.5,3684.5 C99.2@11560,3686 11560,3910.17 D10.2@11599.33,3949.5 ; D10.2@11570.9,3911.57 D10.2@11599.33,3940
SW_5: C106.2 I1.1 SW.1@13675,5510 U6.2 | length 256.1
  Top Layer w10: SW.1@13680.35,5510 13680.35,5460.35 13710.71,5430 ; 13745.35,5325 C106.2@13908.86,5325
SW_6: C180.2 D12.2 L6.1 SW.1@13060,3185 U7.9 | length 423.6
  Top Layer w10: SW.1@13060,3185 13060,3203.86 13072.95,3190.91 13072.95,3190.54 13078.8,3184.68 C180.2@13145,3184.68 C180.2@13146.5,3186.18
  Top Layer w20: C180.2@13146.5,3186.18 13146.5,3442.17 D12.2@13184.33,3480
SW_7: C119.2 I2.1 SW.1@14319.65,5510 U8.2 | length 256.1
  Top Layer w10: SW.1@14320,5510 14320,5460.35 14350.35,5430 ; 14385,5325 C119.2@14548.5,5325
SW_8: C169.2 I5.1 SW.1@14954.65,5510 U11.2 | length 256.1
  Top Layer w10: SW.1@14959.65,5510 14959.65,5460.35 14990,5430 ; 15024.65,5325 C169.2@15188.15,5325
SWCLK: J10.4 U9.38 | length 773.7
  Top Layer w10: J10.4@12000,6525 12086.73,6438.27 12737.36,6438.27 U9.38@12737.68,6438.58
SWDIO: J10.3 U9.37 | length 665.3
  Top Layer w10: J10.3@12100,6525 12166.73,6458.27 U9.37@12737.68,6458.27
TEMP_3V3_BUCK: R71.2 R72.2 U9.25 | length 2697
  Top Layer w10: 13020,6535 13020.36,6535 13220.36,6735 13222.29,6735 v1(13227.29,6740) ; v1(14240,5855) v1(14340,5755) ; v1(14700,5125) 14700,5122.29 14704.68,5117.61 R72.2@14704.68,5090 14704.68,5065.31 14705,5065 14705,5036.5 R71.2@14715,5026.5
  Bottom Layer w10: v1(13227.29,6740) 13355,6740 v1(14240,5855) ; v1(14340,5755) 14340,5754.64 14454.64,5640 14455,5640 14700,5395 v1(14700,5125)
TEMP_5V_BUCK: R67.2 R70.2 U9.15 | length 1702.1
  Top Layer w10: U9.15@13072.32,6281.1 13073.32,6280.1 13099.9,6280.1 13178.09,6201.91 13221.56,6201.91 13238.47,6185 v1(13240,6185) ; v1(14060,5135) 14059.84,5134.84 14059.84,5095.16 R70.2@14059.68,5095 14060,5094.69 14060,5051.5 R67.2@14075,5036.5
  Bottom Layer w10: v1(13240,6185) 13240,6155 14060,5335 v1(14060,5135)
TEMP_7V_BUCK: R66.2 R69.2 U9.18 | length 3405.7
  Top Layer w10: U9.18@13072.32,6340.16 13132.14,6340.16 13142.29,6330 v1(13145,6330) ; R69.2@13400,3339.68 13447.2,3339.68 13462.52,3355 v1(13462.52,3404) ; v1(13630,3735) v1(13630,3930)
  Bottom Layer w10: v1(13145,6330) 13170,6330 13200,6300 13200,6150 13405,5945 13405,4750 13630,4525 v1(13630,3930) ; v1(13462.52,3404) 13630,3571.48 v1(13630,3735)
TEMP_12V_BUCK: R65.2 R68.2 U9.12 | length 2639.4
  Top Layer w10: R68.2@12570,3789.68 12618.19,3789.68 R65.2@12628.5,3800 12630,3801.5 v1(12630,3850.5) ; U9.12@13013.27,6182.68 13013.27,6111.73 v1(13050,6075)
  Bottom Layer w10: v1(12630,3850.5) 12745,3965.5 12745,4175.14 12750,4180.14 12750,4200.86 12745,4205.86 12745,5020.2 12745.42,5020.62 12745.42,5474.58 13050,5779.16 v1(13050,6075)
TEMP_12V_BUCKS: R61.2 R64.2 U9.29 | length 3711.3
  Top Layer w10: U9.29@12934.53,6517.32 12934.53,6548.35 13117.91,6731.73 13117.91,6738.26 v1(13119.82,6740.18) ; R64.2@15339.68,5090 15339.68,5065.31 15340,5065 15340,5046.5 R61.2@15355,5031.5 ; R64.2@15339.84,5090.16 v1@15339.84,5129.84
  Bottom Layer w10: v1(13119.82,6740.18) 13209.64,6830 14230,6830 15340,5720 v1(15340,5130)
TEMP_18V_BUCK: R60.2 R63.2 U9.9 | length 2910.8
  Top Layer w10: R63.2@11805,3789.18 11853.19,3789.18 R60.2@11863.5,3799.5 11865,3801 v1(11865,3850) ; v1(12005,4840) v1(12005,4975) ; U9.9@12954.21,6182.68 12954.21,6090.79 v1(12970,6075)
  Bottom Layer w10: v1(11865,3850) 12005,3990 v1(12005,4840) ; v1(12005,4975) 12005,5030 12970,5995 v1(12970,6075)
TEMP_24V_BUCK: R59.2 R62.2 U9.6 | length 3264.5
  Top Layer w10: R62.2@11040,3984.68 11088.19,3984.68 R59.2@11098.5,3995 11100,3996.5 v1(11100,4045.5) ; v1(12875,6120) 12875,6120.36 12895.16,6140.51 U9.6@12895.16,6182.68
  Bottom Layer w10: v1(11100,4045.5) 11290.83,4236.33 11290.83,4985 ; 11290,4985 11425,5120 11885,5120 12873.09,6108.09 12873.09,6118.09 v1(12875,6120)
VBAT: C168.2 D15.1 F1.1 F2.1 F3.1 F4.1 F5.1 F6.1 J3.2 R87.1 VBAT.1 | length 84.9
  Top Layer w20: 12770,2615 VBAT.1@12830,2675
VBAT_18: C85.2 C86.2 C87.2 C91.2 C92.2 C93.2 C94.2 C100.2 C101.2 F1.2 R34.2 U5.2
VBAT_24: C64.2 C65.2 C66.2 C70.2 C71.2 C72.2 C73.2 C79.2 C80.2 F3.2 R26.2 U4.2
VBAT_AUTON: C1.2 C2.2 C3.2 C7.2 C8.2 C9.2 C10.2 C16.2 C17.2 F5.2 R2.2 U1.2
VBAT_BUCKS: C22.2 C23.2 C24.2 C28.2 C29.2 C30.2 C31.2 C37.2 C38.2 F6.2 R10.2 U2.2
VBAT_LDOS: C114.2 C115.2 C116.2 C162.2 C163.2 C164.2 C165.2 C181.2 C182.2 F4.2 R44.2 U7.2
VBAT_MCU: 3V3.1@13465,6035 ?.2@14348.46,6665 C132.2 C135.2 C136.2 C137.2 C138.2 C139.2 C140.2 C141.2 C142.2 C143.2 C144.2 C145.2 C146.2 C147.1 C148.1 C149.1 C150.1 C151.1 C152.1 C153.1 I3.2 I3.4 J10.5 R50.2 R51.2 R52.2 R57.2 R58.2 R59.1 R60.1 R61.1 R65.1 R66.1 R67.1 R71.1 U9.1 U9.20 U9.21 U9.24 U9.36 U9.48 U10.5 U12.6 U12.7 U13.6 U13.7 U14.6 U14.7 U15.6 U15.7 U16.6 U16.7 U17.6 U17.7 U18.6 U18.7 | length 3443.9
  Top Layer w10: v1(10750,5195) U12.6@10750,5256.35 ; v1(10800,5195) U12.7@10800,5256.35 ; R59.1@11161.5,3995 11161.5,3930.66 11165,3927.15 v1(11165,3875) ; v1(11515,4890) U13.6@11515,4955.85 ; v1(11565,4890) U13.7@11565,4955.85 ; R60.1@11926.5,3799.5 11926.5,3735.16 C148.1@11930,3731.65 ; R57.2@11945,6799.69 v1(11945,6835) ; v1(12280,4895) U15.6@12280,4956.35 ; v1(12330,4895) U15.7@12330,4956.35 ; R58.2@12335,6799.69 v1(12335,6835) ; v1(12345,6380) R52.2@12375.63,6380 ; v1(12380,6335) 12395,6320 12415.32,6320 R51.2@12415.47,6319.84 ; v1(12440,6275) 12455,6260 R50.2@12475.32,6260 R50.2@12472.08,6256.76 ; v1(12635,6215) 12635.16,6215.16 12669.84,6215.16 C140.2@12670,6215.31 12676.81,6222.13 12689.68,6222.13 12708.28,6240.73 12736.68,6240.73 U9.48@12737.68,6241.73 ; R65.1@12691.5,3800 12691.5,3735.66 12695,3732.15 v1(12695,3670) ; v1(12725,6670) 12750.32,6644.69 C141.2@12750.32,6600 12757.13,6593.19 12757.13,6577.87 12795.73,6539.27 12795.73,6518.32 U9.36@12796.73,6517.32 ; v1(12785,6120) 12785,6122.71 12796.73,6134.44 U9.1@12796.73,6182.68 U9.1@12795.87,6181.81 ; U10.5@12920,6918.43 12925.49,6923.91 12925.49,6955.49 v1(12945,6975) ; U9.20@13072.32,6379.53 13110.82,6379.53 13111.3,6380 13130,6380 13136.5,6386.5 C143.2@13195,6386.5 C144.2@13255,6386.5 C144.2@13256.34,6385.16 ; U9.21@13072.32,6399.21 13112.36,6399.21 13148.15,6435 C145.2@13195,6435 ; U9.24@13072.32,6458.27 13073.32,6459.27 13099.27,6459.27 13120,6480 13120,6530 13155.32,6565.31 C139.2@13190,6565.31 13231.81,6565.31 C142.2@13240,6573.5 C142.2@13241.65,6575.16 ; v1(13080,4384.5) U16.6@13080,4445.85 ; v1(13130,4384.5) U16.7@13130,4445.85 ; C145.2@13195,6448.5 C146.2@13255,6448.5 C146.2@13258.35,6445.16 ; v1(13450,6245) v1(13450,6280) v1(13450,6315) v1(13450,6355) v1(13485,6355) v1(13485,6315) v1(13485,6280) v1(13485,6245) ; R66.1@13526.5,3355 13526.5,3283.15 C151.1@13529.65,3280 ; v1(13530,3220) C151.1@13530,3280 ; v1(13765,5810) 13765.18,5810.18 13765.18,5865.67 U17.6@13770.35,5870.85 ; v1(13815,5808.94) 13815.18,5809.11 13815.18,5865.67 U17.7@13820.15,5870.64 ; v1(14005,4915) C152.1@14005,4970.35 14071.85,4970.35 R67.1@14075,4973.5 ; v1(14410,5810) U18.6@14410,5870.85 ; v1(14460,5810) U18.7@14460,5870.85 ; v1(14645,4915) C153.1@14645,4960.35 14648.15,4963.5 R71.1@14715,4963.5 ; v1(15044.65,5810) 15045,5810.35 U14.6@15045,5870.85 ; v1(15095,5810) 15095,5866.2 U14.7@15099.44,5870.64 ; v1(15230,4965) 15284.65,4965 C149.1@15285,4965.35 15351.85,4965.35 R61.1@15355,4968.5
  Top Layer w20: J10.5@11899.16,6525.84 J10.5@11900,6525 ; v1(11930,3680) C148.1@11930,3731.65 ; C142.2@13241.65,6575.16 13314.84,6575.16 ; C144.2@13256.34,6385.16 13309.84,6385.16 ; C146.2@13258.35,6445.16 13309.84,6445.16
  other v1: 14245,6630 14280,6630 14245,6670 14280,6670
VBAT_REST: C43.2 C44.2 C45.2 C49.2 C50.2 C51.2 C52.2 C58.2 C59.2 F2.2 R18.2 U3.2
pads on no net: J1.1@10704.88,6057.83 J1.1@10704.88,6412.17 J2.1@10704.88,6507.83 J2.1@10704.88,6862.17 J4.1@12977.83,7047.83 J4.1@13332.17,7047.83 J5.1@13562.83,7155.12 J5.1@13917.17,7155.12 J6. J7.1@14012.83,7155.12 J7.1@14367.17,7155.12 J8. J9.1 J11.1 U6.5 U8.5 U9.2 U9.3 U9.4 U9.10 U9.13 U9.14 U9.22 U9.27 U9.39 U9.41 U9.46 U11.5 U12.4 U13.4 U14.4 U15.4 U16.4 U17.4 U18.4

## Polygon pours and split planes (outlines as drawn)
5V_LDO on Top Layer "NONET_L-01_P-001" (solid, shelved, pour order 190): 13725,6725 13735,6715 13735,6615 13725,6605 13655,6605 13605,6655 13605,6675 13655,6725 13685,6725
VBAT_MCU on Top Layer "NONET_L-01_P-001" (solid, shelved, pour order 189): 14370,6725 14380,6715 14380,6615 14370,6605 14230,6605 14220,6615 14220,6685 14260,6725
GND on Top Layer "NONET_L01_P191" (solid, remove dead copper, shelved, pour order 191): 10525,1965 10525,7165 cw(c10675,7165) 10675,7315 15375,7315 cw(c15375,7165) 15525,7165 15525,1965 cw(c15375,1965) 15375,1815 10675,1815 cw(c10675,1965)
7V_BUCK_C on Top Layer "NONET_L01_P188" (solid, shelved, pour order 188): 13160,5025 13160,4625 13175,4610 13370,4610 13380,4620 13380,4700 13310,4770 13310,5025 13300,5035 13170,5035
7V_BUCK_F on Top Layer "NONET_L01_P187" (solid, shelved, pour order 187): 13445,5375 13425,5355 13425,5255 13310,5140 13310,5105 13300,5095 13170,5095 13160,5105 13160,5135 13045,5250 13045,5360 13070,5385 13070,5440 13075,5445 13120,5445 13125,5440 13125,5385 13150,5360 13370,5360 13395,5385 13395,5440 13400,5445 13440,5445 13445,5440
VBAT_LDOS on Top Layer "NONET_L01_P184" (solid, remove dead copper, shelved, pour order 184): 13170,2852.87 13147.13,2830 13085,2830 13070,2815 13070,2760 13070,2650 13100,2620 13410,2620 13445,2655 13445,2935 13435,2945 13390,2945 13250,3085 13250,3190.5 13225,3190.5 13225,3155.5 13195,3125.5 13195,3125 13190,3120 13180,3120 13170,3110
7V_BUCK on Top Layer "NONET_L01_P186" (solid, shelved, pour order 186): 13365,3715 13365,3725 13350,3740 13350,3920 13380,3950 13380,4465 13400,4485 13400,4495 13395,4500 13185,4500 13170,4485 13170,4320 13170,3995 13245,3920 13245,3725 13255,3715
SW_6 on Top Layer "NONET_L01_P185" (solid, remove dead copper, shelved, pour order 185): 13135,3690 13135,3870 13125,3880 13050,3880 13040,3870 13040,3690 13040,3595 13085,3550 13085,3410 13100,3395 13120,3395 13140,3375 13150,3375 13170,3393 13197.5,3393 13230,3360.5 13230,3310.5 13245,3310.5 13245,3360.5 13252.5,3368 13253,3368 13285,3400 13285,3540 13145,3680
SW_8 on Top Layer "NONET_L01_P152" (solid, shelved, pour order 152): 14974.83,5425.17 14974.82,5425.18 14974.82,5445.18 14994.82,5445.18 14994.83,5445.17 15014.65,5464.98 15014.65,5575 15019.65,5580 15084.65,5580 15089.65,5575 15089.65,5435 15024.65,5375 15024.65,5340 15034.65,5330 15034.65,5320 15024.65,5310 15024.65,5255.35 15035,5245 15094.65,5245 15099.65,5240 15099.65,5220 15094.65,5215 15019.65,5215 14959.65,5275 14959.65,5409.98
18V_BUCK on Top Layer "NONET_L01_P117" (solid, shelved, pour order 117): 11820,4990 11825,4985 11825,4975 11820,4970 11820,4905 11795,4880 11795,4185 11850,4130 11850,4095 11845,4090 11675,4090 11655,4110 11655,4425 11585,4495 11585,4705 11570,4720 11570,4830 11590,4850 11590,4975 11625,5010 11810,5010 11820,5000
12V_REST_C on Top Layer "NONET_L01_P183" (solid, shelved, pour order 183): 12365,5395 12380,5410 12530,5410 12590,5350 12590,5140 12580,5130 12375,5130 12365,5140
18V_BUCK_C on Top Layer "NONET_L01_P182" (solid, shelved, pour order 182): 11600,5394.5 11615,5409.5 11765,5409.5 11825,5349.5 11825,5140 11814.5,5129.5 11610.5,5129.5 11600,5140
24V_BUCK_C on Top Layer "NONET_L01_P181" (solid, shelved, pour order 181): 10835,5695 10850,5710 11000,5710 11060,5650 11060,5445 11045,5430 10845,5430 10835,5440
12V_REST_F on Top Layer "NONET_L01_P168" (solid, shelved, pour order 168): 11630,7055 11630,6395 12360,5665 12520,5665 12530,5655 12530,5485 12520,5475 12390,5475 12375,5490 12375,5500 11530,6345 11530,7025 11500,7055 11070,7055 11040,7085 11040,7150 11065,7175 11510,7175
VBAT_18 on Top Layer "NONET_L01_P080" (solid, remove dead copper, shelved, pour order 80): 11585,3322.87 11562.13,3300 11500,3300 11485,3285 11485,3230 11485,3120 11515,3090 11825,3090 11860,3125 11860,3405 11850,3415 11805,3415 11665,3555 11665,3655 11662.62,3660 11642.38,3660 11640,3655 11640,3625.5 11610,3595.5 11610,3595 11605,3590 11595,3590 11585,3580
SW_3 on Top Layer "NONET_L01_P130" (solid, remove dead copper, shelved, pour order 130): 10900.5,4240 10790,4350.5 10790,4635.5 10780.25,4645.25 10680,4645.25 10670.25,4635.5 10670.25,4295 10735,4215.5 10735,4075.5 10750,4060.5 10770,4060.5 10790,4040.5 10800,4040.5 10820,4058.5 10847.5,4058.5 10880,4026 10880,3976 10895,3976 10895,4026 10902.5,4033.5 10903,4033.5 10935,4065.5 10935,4205.5
RA_LASER_GND on Top Layer "NONET_L01_P175" (solid, shelved, pour order 175): 13140,7075 13210,7005 13355,7005 13370,7020 13455,7020 13460,7015 13460,6985 13440,6965 13160,6965 13050,7075 13050,7145 13070,7165 13120,7165 13140,7145
5V_BUCK_F on Top Layer "NONET_L01_P174" (solid, shelved, pour order 174): 13885,6570 13860,6595 13860,6740 13885,6765 13885,7000 13835,7050 13445,7050 13405,7090 13300,7090 13285,7075 13200,7075 13170,7105 13170,7150 13185,7165 13455,7165 13505,7115 13585,7115 13645,7175 13840,7175 14035,6980 14035,6400 14025,6390 13895,6390 13885,6400
5V_LDO on Top Layer "NONET_L01_P173" (solid, shelved, pour order 173): 13075,5935 13055,5955 13005,5955 12945,6015 12575,6015 12545,5985 12545,5910 12575,5880 12780,5880 12800,5860 12820,5860 12840,5880 12915,5880 12935,5860 12935,5620 12980,5575 12980,5380 12985,5375 13025,5375 13030,5380 13030,5575 13075,5620
VBAT_MCU on Top Layer "NONET_L01_P172" (solid, shelved, pour order 172): 13400,5620 13355,5575 13355,5380 13350,5375 13310,5375 13305,5380 13305,5575 13260,5620 13260,6155 13320,6215 13320,6370 13310,6380 13310,6390 13320,6400 13320,6430 13310,6440 13310,6450 13320,6460 13320,6560 13310,6570 13310,6580 13320,6590 13435,6590 13510,6515 13510,6215 13400,6105
3V3_BUCK_F on Top Layer "NONET_L01_P171" (solid, shelved, pour order 171): 14530,6570 14505,6595 14505,6735 14530,6760 14530,6805 14285,7050 14110,7050 14080,7080 14080,7150 14105,7175 14290,7175 14680,6785 14680,6400 14665,6385 14545,6385 14530,6400
12V_BUCKS on Top Layer "NONET_L01_P125" (solid, shelved, pour order 125): 13765,4840 13745,4820 13745,4679.41 13929.41,4495 13950,4495 13970,4495 14015,4450 14015,4435 14020,4430 14035,4430 14080,4385.01 14080,4025 14150,3955 14150,3640 14170,3620 14340,3620 14345,3625 14345,3660 14290,3715 14290,4490 14460,4660 14460,4830 14450,4840 14315,4840 14225,4750 13995,4750 13905,4840
SW_7 on Top Layer "NONET_L01_P148" (solid, shelved, pour order 148): 14335.18,5425.17 14335.18,5425.18 14335.18,5445.18 14355.18,5445.18 14355.18,5445.17 14375,5464.98 14375,5575 14380,5580 14445,5580 14450,5575 14450,5435 14385,5375 14385,5340 14395,5330 14395,5320 14385,5310 14385,5255 14395,5245 14455,5245 14460,5240 14460,5220 14455,5215 14380,5215 14320,5275 14320,5409.98
3V3_BUCK on Top Layer "NONET_L01_P149" (solid, shelved, pour order 149): 14715,5859.82 14705.35,5850.18 14705.35,5835.35 14660,5790 14660,5585 14670,5575 14670,5435 14660,5425 14645,5425 14635,5415 14625,5415 14615,5425 14600,5425 14590,5435 14590,5570 14525,5635 14525,5795 14490,5830 14490,5910 14525,5945 14695,5945 14705,5935 14705,5880 14715,5870
3V3_BUCK_C on Top Layer "NONET_L01_P150" (solid, shelved, pour order 150): 14690,6010 14705,6025 14705,6125 14680,6150 14680,6320 14670,6330 14540,6330 14530,6320 14530,6190 14495,6155 14495,6045 14530,6010
12V_BUCKS_FUSED_1 on Top Layer "NONET_L01_P162" (solid, shelved, pour order 162): 14460,5200 14450,5210 14410,5210 14310,5110 14310,4910 14315,4905 14455,4905 14460,4910
18V_BUCK_F on Top Layer "NONET_L01_P167" (solid, shelved, pour order 167): 11765,5655 10805,6615 10805,6780 10775,6810 10710,6810 10680,6780 10680,6595 11615,5660 11615,5485 11625,5475 11755,5475 11765,5485
24V_BUCK_F on Top Layer "NONET_L01_P165" (solid, shelved, pour order 165): 10850,5960 10680,6130 10680,6330 10705,6355 10775,6355 10800,6330 10800,6155 11000,5955 11000,5785 10990,5775 10860,5775 10850,5785
VBAT on Top Layer "NONET_L01_P164" (solid, remove dead copper, shelved, pour order 164): 12750,2635 12775,2635 12790,2620 12790,2595 12990,2395 13085,2395 13180,2490 13180,2575 13190,2585 13320,2585 13330,2575 13330,2490 13425,2395 13995,2395 14090,2490 14090,2575 14100,2585 14230,2585 14240,2575 14240,2490 14335,2395 14840,2395 14935,2490 14935,2575 14945,2585 15075,2585 15085,2575 15085,2205 14880,2000 12820,2000 12405.54,2410.55 11965,2410 11850,2525 10780,2525 10660,2645 10660,2900 10830,3070 10830,3240 10840,3250 10970,3250 10980,3240 10980,3070 11185,2865 11495,2865 11595,2965 11595,3045 11605,3055 11735,3055 11745,3045 11745,2965 11845,2865 12265,2865 12360,2960 12360,3045 12370,3055 12500,3055 12510,3045 12510,2875
12V_BUCKS_FUSED_0 on Top Layer "NONET_L01_P163" (solid, shelved, pour order 163): 13755.71,4915 13770.71,4900 13900.71,4900 13910.71,4910 13910.71,5085 13900.71,5095 13820.71,5175 13820.71,5195 13810.71,5205 13765.71,5205 13755.71,5195
3V3_AUTONLED_F on Top Layer "NONET_L01_P160" (solid, shelved, pour order 160): 14980,7175 15315,6840 15315,6400 15305,6390 15175,6390 15165,6400 15165,6865 14975,7055 14900,7055 14875,7080 14875,7150 14900,7175
SW_4 on Top Layer "NONET_L01_P083" (solid, remove dead copper, shelved, pour order 83): 11535,3865 11515,3865 11500,3880 11500,4020 11415,4105 11415,4430 11425,4440 11550,4440 11560,4430 11560,4150 11700,4010 11700,3870 11668,3838 11667.5,3838 11660,3830.5 11660,3780.5 11645,3780.5 11645,3830.5 11612.5,3863 11585,3863 11565,3845 11555,3845